# Altium PCB DGCtrl.PcbDoc (part 1 of 3)
Units mm, origin at the board's own origin, x right, y up, seen from the top; angles counter-clockwise.
Board outline 197.61 x 87.2 mm, 2 copper layers (Top Layer, Bottom Layer); 304 components, 306 nets, 985 pads, 136 vias.
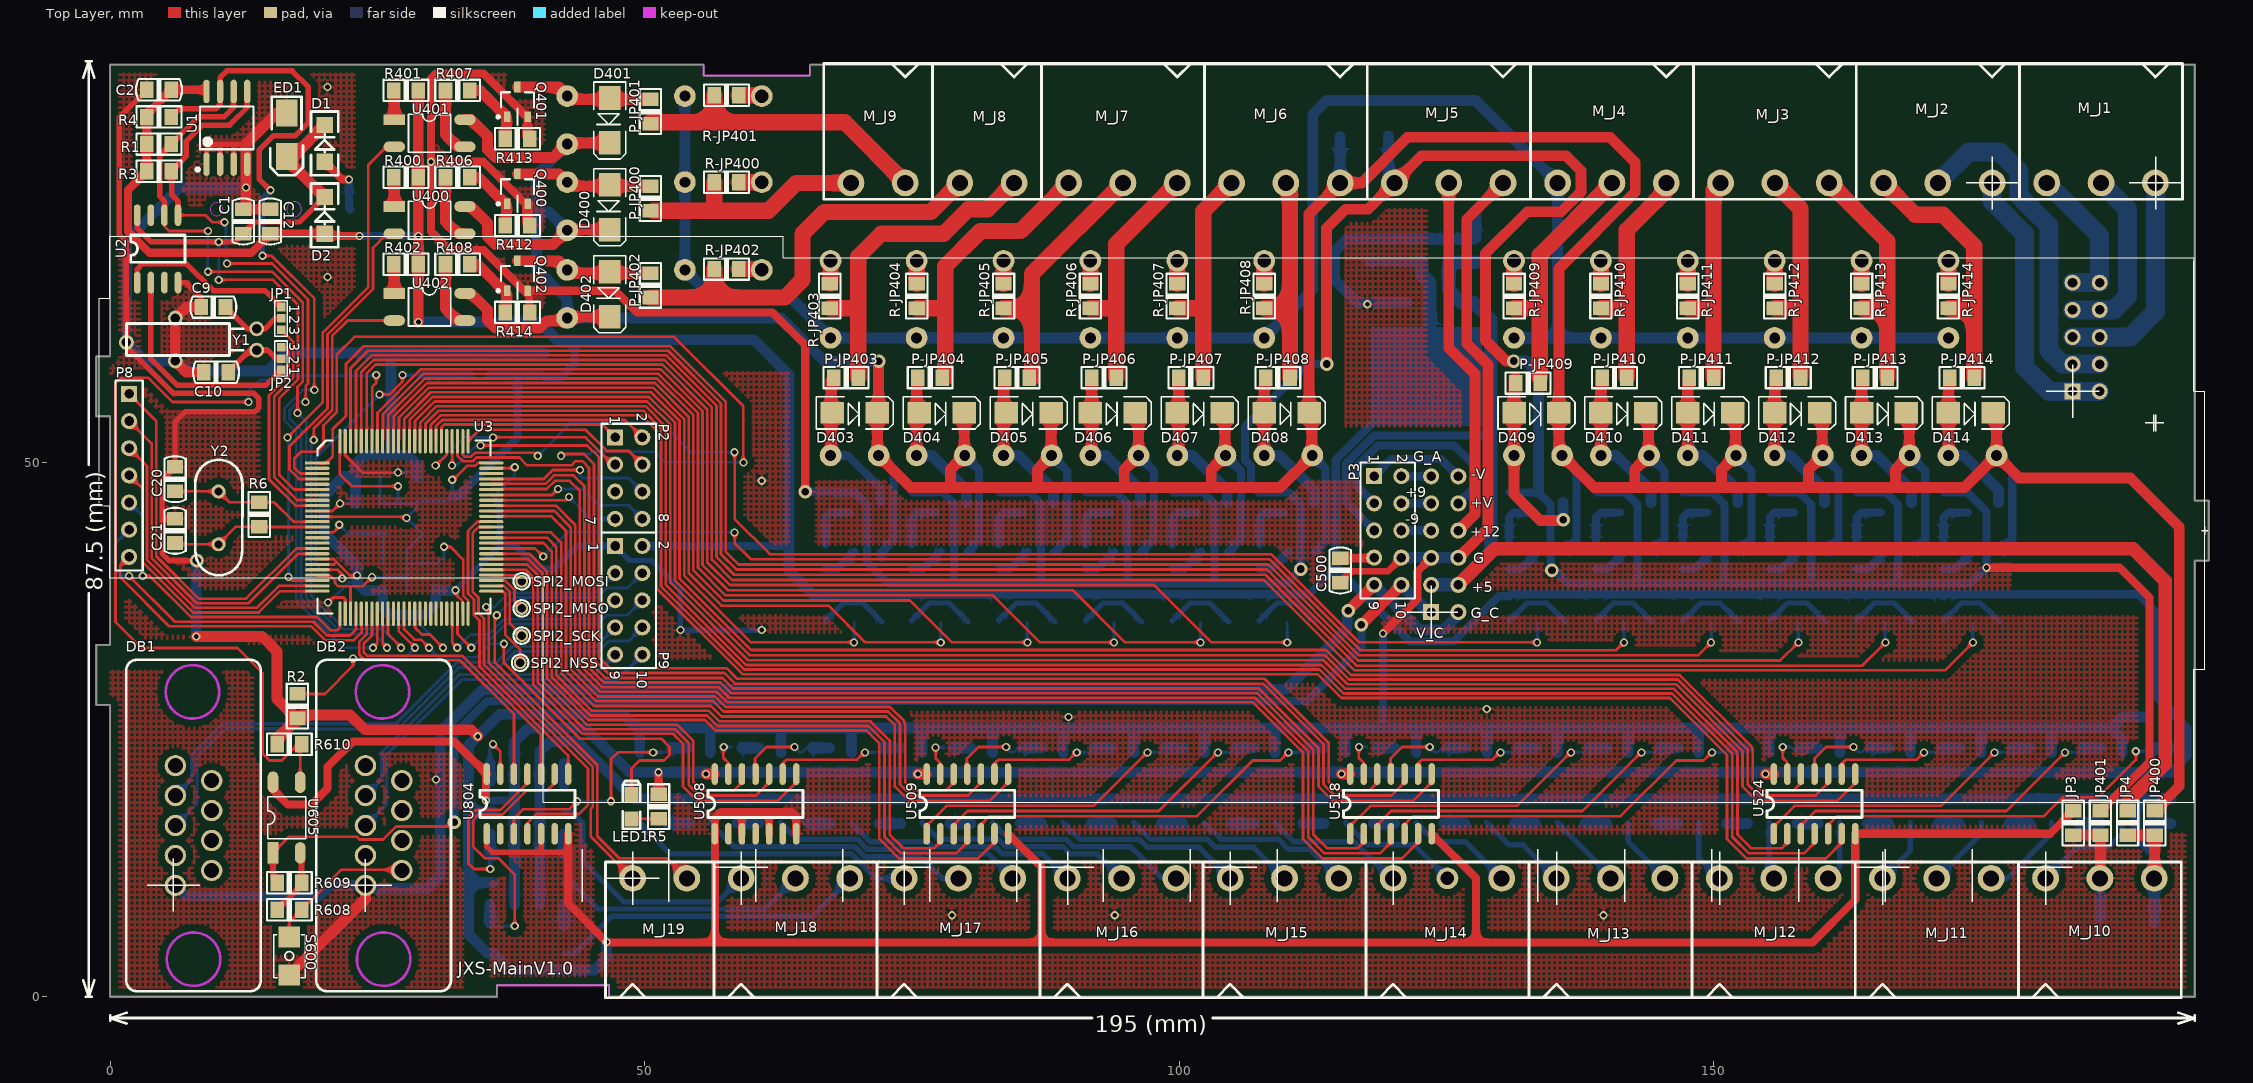
[diagram p0: Top Layer view]
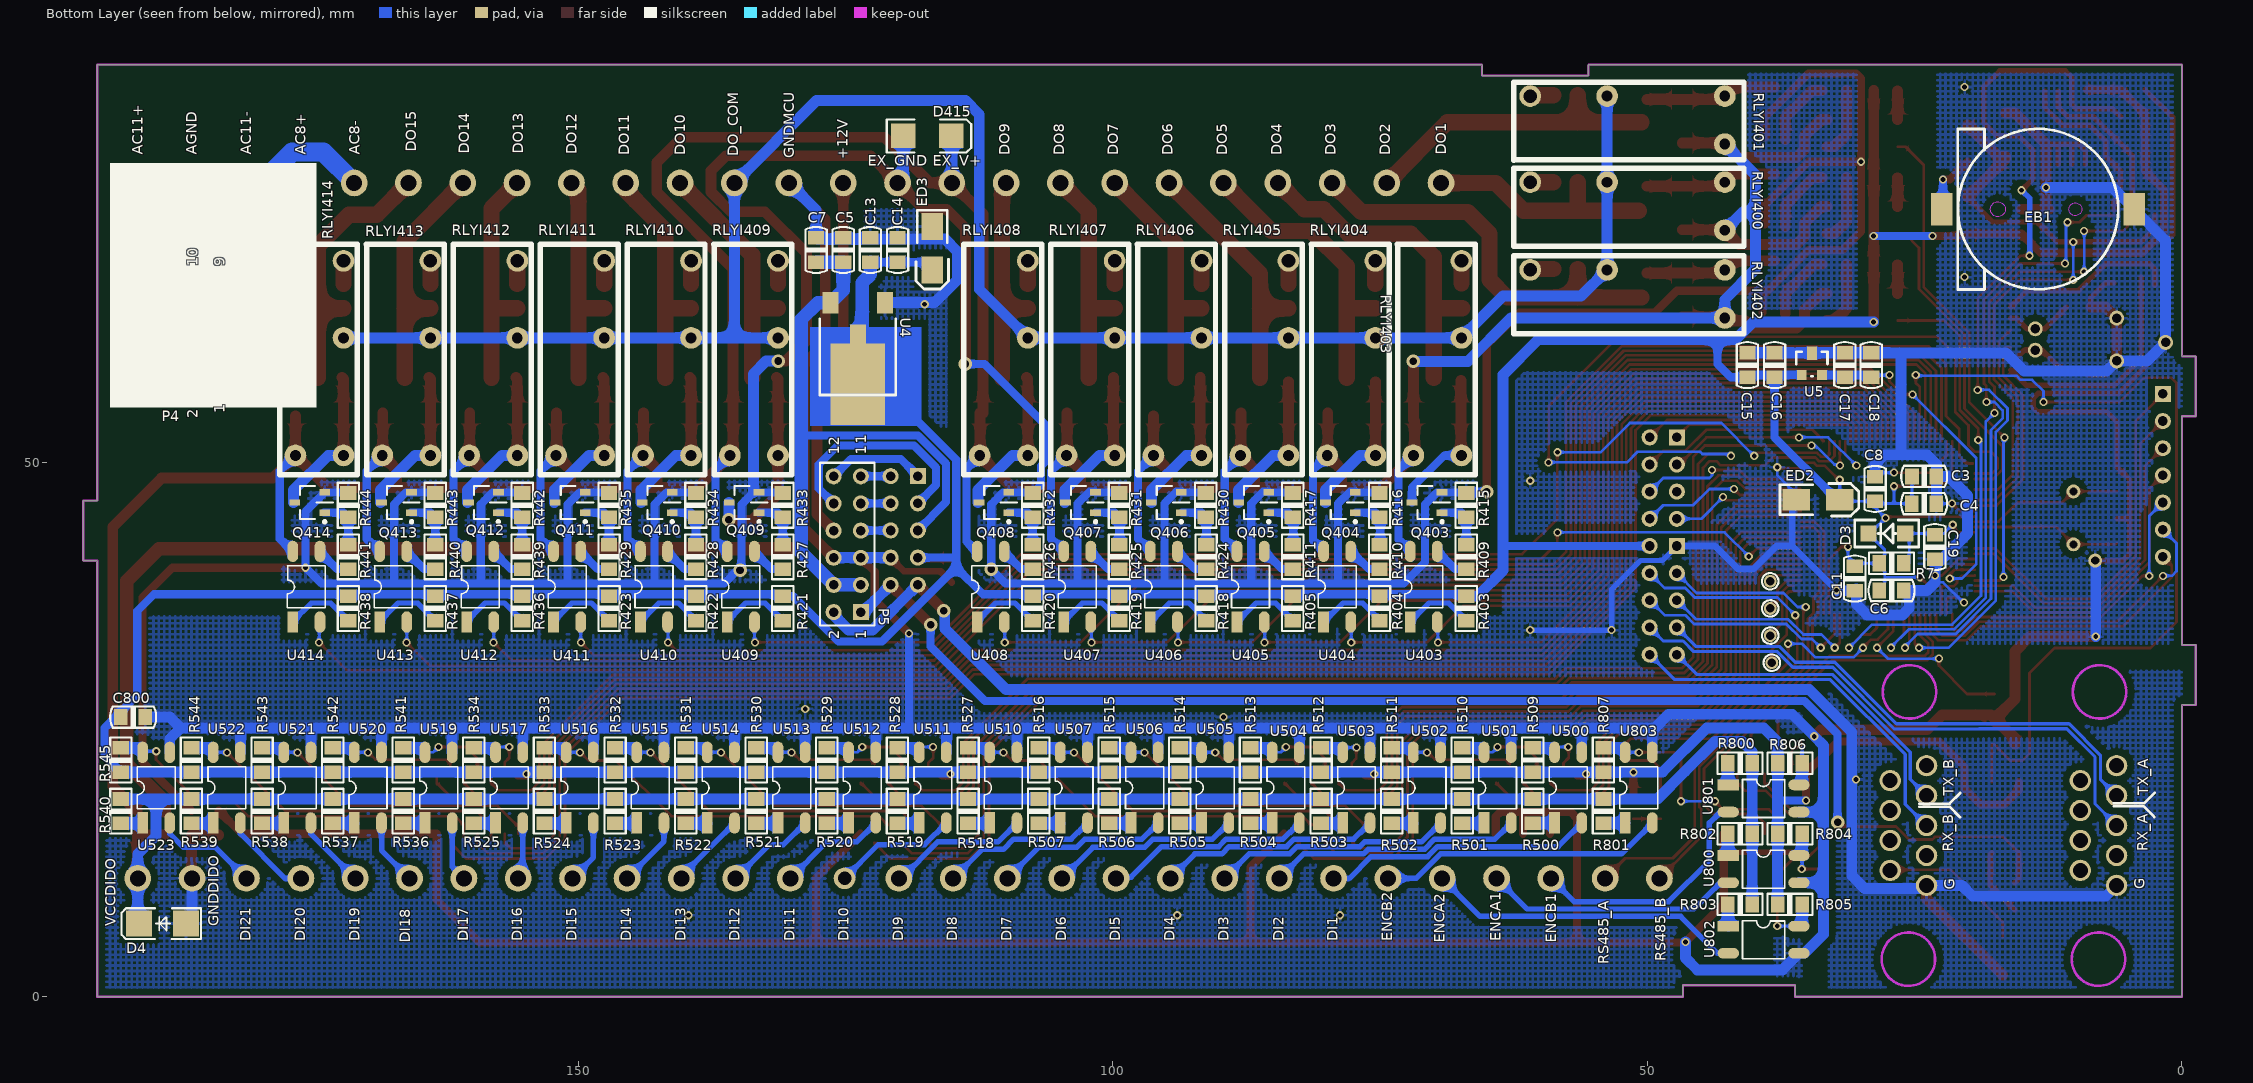
[diagram p1: Bottom Layer view, seen from below]

## Layer stack, top to bottom
Top Solder: solder mask 0.0102, Solder Resist, Dk 3.5
Top Layer: signal copper 0.0356
Dielectric 1: dielectric 0.32, FR-4, Dk 4.8
Bottom Layer: signal copper 0.0356
Bottom Solder: solder mask 0.0102, Solder Resist, Dk 3.5

## Board outline
-1.3,27.3 0,27.3 0,0 36.176,0 36.176,1.067 46.676,1.067 46.676,0 195.007,0 195.007,40.8 196.307,40.8 196.307,46.4 195.007,46.4 195.007,87.2 65.457,87.2 65.457,86.157 55.507,86.157 55.507,87.2 0,87.2 0,59.9 -1.3,59.9 -1.3,54.3 0,54.3 0,32.9 -1.3,32.9

## Design rules (kind name [scope] priority, off if disabled: settings)
Clearance Clearance_Ploygon [All vs InPolygon] p1: gap=0.635
Clearance [All] p2: gap=0.178
MinimumSolderMaskSliver MinimumSolderMaskSliver_TLP181 [(ISPAD AND InComponent('U501')) OR  (ISPAD AND InComponent('U502')) OR (ISPAD AND InComponent('U503')) OR (ISPAD AND InComponent('U504')) OR (ISPAD AND InComponent('U505')) OR (ISPAD AND InComponent('U506')) OR (ISPAD AND InComponent('U507')) OR (ISPAD AND InComponent('U510')) OR (ISPAD AND InComponent('U511')) OR (ISPAD AND InComponent('U512')) OR (ISPAD AND InComponent('U513')) OR (ISPAD AND InComponent('U514')) OR (ISPAD AND InComponent('U515')) OR (ISPAD AND InComponent('U516')) OR (ISPAD AND InComponent('U517')) OR (ISPAD AND InComponent('U519')) OR (ISPAD AND InComponent('U520')) OR (ISPAD AND InComponent('U521')) OR (ISPAD AND InComponent('U522')) OR (ISPAD AND InComponent('U523')) OR (ISPAD AND InComponent('U800')) OR (ISPAD AND InComponent('U801')) OR (ISPAD AND InComponent('U802')) OR (ISPAD AND InComponent('U803')) OR (ISPAD AND InComponent('U804')) OR (ISPAD AND InComponent('U500'))] p1: minsoldermaskwidth=0.178
MinimumSolderMaskSliver MinimumSolderMaskSliver_LQFP100 [HasFootprint('LQFP-100') vs HasFootprint('LQFP-100')] p2: minsoldermaskwidth=0
MinimumSolderMaskSliver MinimumSolderMaskSliver_JP-3 [HasFootprint('JP-3') vs HasFootprint('JP-3')] p3: minsoldermaskwidth=0
MinimumSolderMaskSliver [All] p4: minsoldermaskwidth=0.254
PolygonConnect [All] p1: connectstyle=Relief reliefconductorwidth=0.254 reliefentries=4 polygonreliefangle="90 Angle" airgapwidth=0.254
RoutingVias [All] p1: holewidth=0.457 width=0.762 viastyle="Through Hole" minholewidth=0.457 minwidth=0.762 maxholewidth=0.711 maxwidth=1.27
SilkToSilkClearance [All] p1: silktosilkclearance=0
SilkToSolderMaskClearance [IsPad] p1: minsilkscreentomaskgap=0 clearancetoexposedcopper=TRUE
SolderMaskExpansion [All] p1: expansion=0.102
Width [All] p1: maxlimit=2.54 minlimit=0.178 preferedwidth=0.254 minimp=50.000000 maximp=50.000000 favimp=50.000000
27 further rules are at their usual default settings.

## Classes and differential pairs
component class DGCtrl: C1 C2 C3 C4 C5 C6 C7 C8 C9 C10 C11 C12 C13 C14 C15 C16 C17 C18 C19 C20 C21 D1 D2 D3 D4 DB1 DB2 EB1 ED1 ED2 ED3 JP1 JP2 JP3 JP4 LED1 M_J1 M_J2 M_J3 M_J4 M_J5 M_J6 M_J7 M_J8 M_J9 M_J10 M_J11 M_J12 M_J13 M_J14 M_J15 M_J16 M_J17 M_J18 M_J19 P2 P3 P4 P5 P8 P9 R1 R2 R3 R4 R5 R6 R7 R608 R609 R610 S600 SPI2_MISO SPI2_MOSI SPI2_NSS SPI2_SCK U1 U2 U3 U4 U5 U605 Y1 Y2
component class Designator: C800 R800 R801 R802 R803 R804 R805 R806 R807 U800 U801 U802 U803 U804

## Components (designator, comment, footprint, x,y, rotation, side; value= is the part's Value field where it differs from the comment)
C1 "104" CAPC_E0805_2012X70N 12.446,72.517 r90 top locked
C2 "104" CAPC_E0805_2012X70N 4.572,84.836 r0 top locked
C3 "104" CAPC_E0805_2012X70N 24.105,48.666 r180 bottom locked
C4 "104" CAPC_E0805_2012X70N 24.111,46.126 r180 bottom locked
C5 "104" CAPC_E0805_2012X70N 125.222,69.85 r90 bottom locked
C6 "104" CAPC_E0805_2012X70N 27.153,37.998 r180 bottom locked
C7 "106" CAPC_E0805_2012X70N 127.762,69.85 r270 bottom locked
C8 "104" CAPC_E0805_2012X70N 28.702,47.498 r90 bottom locked
C9 "22P" CAPC_E0805_2012X70N 9.652,64.516 r180 top locked
C10 "22P" CAPC_E0805_2012X70N 9.906,58.42 r0 top locked
C11 "104" CAPC_E0805_2012X70N 30.607,39.116 r270 bottom locked
C12 "104" CAPC_E0805_2012X70N 14.986,72.517 r90 top locked
C13 "104" CAPC_E0805_2012X70N 122.682,69.85 r90 bottom locked
C14 "106" CAPC_E0805_2012X70N 120.142,69.85 r270 bottom locked
C15 "106" CAPC_E0805_2012X70N 40.64,59.08 r270 bottom locked
C16 "104" CAPC_E0805_2012X70N 38.1,59.08 r90 bottom locked
C17 "104" CAPC_E0805_2012X70N 31.521,59.08 r90 bottom locked
C18 "106" CAPC_E0805_2012X70N 29.058,59.08 r270 bottom locked
C19 "104" CAPC_E0805_2012X70N 23.095,42.062 r270 bottom locked
C20 "22P" CAPC_E0805_2012X70N 6.071,48.412 r270 top locked
C21 "22P" CAPC_E0805_2012X70N 6.071,43.586 r90 top locked
C500 "104" CAPC_E0805_2012X70N 115.062,39.878 r270 top locked
C800 "104" CAPC_E0805_2012X70N 191.643,26.162 r180 bottom locked
D1 "1N4148" N4148 20.066,78.105 r90 top locked
D2 "1N4148" N4148 20.066,71.374 r90 top locked
D3 "1N4148" N4148 25.889,43.332 r0 bottom locked
D4 "SMBJ24CA" SMB#1 186.69,6.858 r0 bottom locked
D400 "1N4007" SMA 46.736,75.939 r270 top locked
D401 "1N4007" SMA 46.736,84.067 r270 top locked
D402 "1N4007" SMA 46.736,67.811 r270 top locked
D403 "1N4007" SMA 67.571,54.61 r0 top locked
D404 "1N4007" SMA 75.699,54.61 r0 top locked
D405 "1N4007" SMA 83.827,54.61 r0 top locked
D406 "1N4007" SMA 91.701,54.61 r0 top locked
D407 "1N4007" SMA 99.829,54.61 r0 top locked
D408 "1N4007" SMA 107.957,54.61 r0 top locked
D409 "1N4007" SMA 131.325,54.61 r0 top locked
D410 "1N4007" SMA 139.453,54.61 r0 top locked
D411 "1N4007" SMA 147.581,54.61 r0 top locked
D412 "1N4007" SMA 155.709,54.61 r0 top locked
D413 "1N4007" SMA 163.837,54.61 r0 top locked
D414 "1N4007" SMA 171.965,54.61 r0 top locked
D415 "SMBJ24CA" SMB#2 117.348,80.518 r180 bottom locked
DB1 "DB9_1" DB9-DIP 6.103,10.414 r90 top locked
DB2 "DB9_1" DB9-DIP 23.883,10.414 r90 top locked
EB1 "CR1220" CR1220 13.462,73.66 r90 bottom locked
ED1 "10uF/16V" 3528 16.51,78.609 r270 top locked
ED2 "10uF/16V" 3528 32.004,46.482 r180 bottom locked
ED3 "10uF/16V" 3528 116.891,67.976 r270 bottom locked
JP1 "Header 3" JP-3 16.002,64.516 r270 top locked
JP2 "Header 3" JP-3 16.002,58.623 r90 top locked
JP3 "0805" RESC_E0805_2012X50N 183.642,16.256 r270 top locked
JP4 "0805" RESC_E0805_2012X50N 188.722,16.256 r270 top locked
JP400 "0" RESC_E0805_2012X50N 191.262,16.256 r270 top locked
JP401 "0" RESC_E0805_2012X50N 186.182,16.256 r270 top locked
LED1 "LED" LED0805 48.768,17.78 r90 top locked
M_J1 "Header 3" DG5.08-3#1 191.32,76.124 r180 top locked
M_J2 "Header 3" DG5.08-3#1 176.048,76.122 r180 top locked
M_J3 "Header 3" DG5.08-3#1 160.808,76.122 r180 top locked
M_J4 "Header 3" DG5.08-3#1 145.568,76.122 r180 top locked
M_J5 "Header 3" DG5.08-3#1 130.302,76.122 r180 top locked
M_J6 "Header 3" DG5.08-3#1 115.062,76.122 r180 top locked
M_J7 "Header 3" DG5.08-3#1 99.822,76.122 r180 top locked
M_J8 "Header 2" DG5.08-2 84.563,76.124 r180 top locked
M_J9 "Header 2" DG5.08-2 74.378,76.124 r180 top locked
M_J10 "Header 3" DG5.08-3#1 181.052,11.074 r0 top locked
M_J11 "Header 3" DG5.08-3#1 165.786,11.074 r0 top locked
M_J12 "Header 3" DG5.08-3#1 150.546,11.074 r0 top locked
M_J13 "Header 3" DG5.08-3#1 135.281,11.074 r0 top locked
M_J14 "Header 3" DG5.08-3#2 120.015,11.074 r0 top locked
M_J15 "Header 3" DG5.08-3#1 104.775,11.074 r0 top locked
M_J16 "Header 3" DG5.08-3#1 89.535,11.074 r0 top locked
M_J17 "Header 3" DG5.08-3#1 74.27,11.074 r0 top locked
M_J18 "Header 3" DG5.08-3#1 59.03,11.074 r0 top locked
M_J19 "Header 2" DG5.08-2 48.87,11.074 r0 top locked
P2 "Header 4X2" HDR2X4 47.244,52.324 r270 top locked
P3 "Header 5X2" HDR2X5 118.244,48.692 r270 top locked
P4 "Header 5X2" HDR2X5 183.573,56.629 r90 bottom locked
P5 "Header 6X2" HDR2X6 123.578,35.979 r90 bottom locked
P8 "Header 7" HDR1X7 1.778,56.388 r270 top locked
P9 "Header 5X2" HDR2X5 47.244,42.164 r270 top locked
P-JP400 "0805" RESC_E0805_2012X50N 50.546,74.676 r90 top locked
P-JP401 "0805" RESC_E0805_2012X50N 50.546,82.797 r90 top locked
P-JP402 "0805" RESC_E0805_2012X50N 50.546,66.548 r90 top locked
P-JP403 "0805" RESC_E0805_2012X50N 68.841,57.912 r180 top locked
P-JP404 "0805" RESC_E0805_2012X50N 76.708,57.912 r180 top locked
P-JP405 "0805" RESC_E0805_2012X50N 84.836,57.912 r180 top locked
P-JP406 "0805" RESC_E0805_2012X50N 92.971,57.912 r180 top locked
P-JP407 "0805" RESC_E0805_2012X50N 101.099,57.912 r180 top locked
P-JP408 "0805" RESC_E0805_2012X50N 109.227,57.912 r180 top locked
P-JP409 "0805" RESC_E0805_2012X50N 132.639,57.404 r180 top locked
P-JP410 "0805" RESC_E0805_2012X50N 140.723,57.912 r180 top locked
P-JP411 "0805" RESC_E0805_2012X50N 148.851,57.912 r180 top locked
P-JP412 "0805" RESC_E0805_2012X50N 156.979,57.912 r180 top locked
P-JP413 "0805" RESC_E0805_2012X50N 165.107,57.912 r180 top locked
P-JP414 "0805" RESC_E0805_2012X50N 173.235,57.912 r180 top locked
Q400 "8050(Y1)" SOT23_95P280X110-3N 38.1,75.572 r90 top locked
Q401 "8050(Y1)" SOT23_95P280X110-3N 38.1,83.7 r90 top locked
Q402 "8050(Y1)" SOT23_95P280X110-3N 38.1,67.444 r90 top locked
Q403 "8050(Y1)" SOT23_95P280X110-3N 70.612,46.228 r0 bottom locked
Q404 "8050(Y1)" SOT23_95P280X110-3N 78.715,46.228 r0 bottom locked
Q405 "8050(Y1)" SOT23_95P280X110-3N 86.817,46.228 r0 bottom locked
Q406 "8050(Y1)" SOT23_95P280X110-3N 94.996,46.228 r0 bottom locked
Q407 "8050(Y1)" SOT23_95P280X110-3N 103.022,46.228 r0 bottom locked
Q408 "8050(Y1)" SOT23_95P280X110-3N 111.125,46.228 r0 bottom locked
Q409 "8050(Y1)" SOT23_95P280X110-3N 134.493,46.228 r0 bottom locked
Q410 "8050(Y1)" SOT23_95P280X110-3N 142.621,46.228 r0 bottom locked
Q411 "8050(Y1)" SOT23_95P280X110-3N 150.749,46.228 r0 bottom locked
Q412 "8050(Y1)" SOT23_95P280X110-3N 158.877,46.228 r0 bottom locked
Q413 "8050(Y1)" SOT23_95P280X110-3N 167.005,46.228 r0 bottom locked
Q414 "8050(Y1)" SOT23_95P280X110-3N 175.133,46.228 r0 bottom locked
R1 "4.7K" RESC_E0805_2012X50N 4.572,79.756 r180 top locked
R2 "10K" RESC_E0805_2012X50N 17.526,27.178 r90 top locked
R3 "4.7K" RESC_E0805_2012X50N 4.572,77.209 r180 top locked
R4 "4.7K" RESC_E0805_2012X50N 4.572,82.296 r180 top locked
R5 "2K" RESC_E0805_2012X50N 51.308,17.78 r90 top locked
R6 "1M" RESC_E0805_2012X50N 13.951,45.11 r90 top locked
R7 "10K" RESC_E0805_2012X50N 27.159,40.538 r0 bottom locked
R400 "1K" RESC_E0805_2012X50N 27.686,76.647 r180 top locked
R401 "1K" RESC_E0805_2012X50N 27.686,84.775 r180 top locked
R402 "1K" RESC_E0805_2012X50N 27.686,68.519 r180 top locked
R403 "1K" RESC_E0805_2012X50N 66.935,36.322 r270 bottom locked
R404 "1K" RESC_E0805_2012X50N 75.048,36.322 r270 bottom locked
R405 "1K" RESC_E0805_2012X50N 83.162,36.322 r270 bottom locked
R406 "1K" RESC_E0805_2012X50N 32.512,76.647 r180 top locked
R407 "1K" RESC_E0805_2012X50N 32.512,84.775 r180 top locked
R408 "1K" RESC_E0805_2012X50N 32.512,68.519 r180 top locked
R409 "1K" RESC_E0805_2012X50N 66.935,41.148 r270 bottom locked
R410 "1K" RESC_E0805_2012X50N 75.048,41.148 r270 bottom locked
R411 "1K" RESC_E0805_2012X50N 83.162,41.148 r270 bottom locked
R412 "1K" RESC_E0805_2012X50N 38.1,72.136 r180 top locked
R413 "1K" RESC_E0805_2012X50N 38.1,80.264 r180 top locked
R414 "1K" RESC_E0805_2012X50N 38.1,64.008 r180 top locked
R415 "1K" RESC_E0805_2012X50N 66.935,45.974 r270 bottom locked
R416 "1K" RESC_E0805_2012X50N 75.048,45.974 r270 bottom locked
R417 "1K" RESC_E0805_2012X50N 83.162,45.974 r270 bottom locked
R418 "1K" RESC_E0805_2012X50N 91.276,36.322 r270 bottom locked
R419 "1K" RESC_E0805_2012X50N 99.389,36.322 r270 bottom locked
R420 "1K" RESC_E0805_2012X50N 107.503,36.322 r270 bottom locked
R421 "1K" RESC_E0805_2012X50N 130.871,36.322 r270 bottom locked
R422 "1K" RESC_E0805_2012X50N 138.999,36.322 r270 bottom locked
R423 "1K" RESC_E0805_2012X50N 147.127,36.322 r270 bottom locked
R424 "1K" RESC_E0805_2012X50N 91.276,41.148 r270 bottom locked
R425 "1K" RESC_E0805_2012X50N 99.389,41.148 r270 bottom locked
R426 "1K" RESC_E0805_2012X50N 107.503,41.148 r270 bottom locked
R427 "1K" RESC_E0805_2012X50N 130.871,41.148 r270 bottom locked
R428 "1K" RESC_E0805_2012X50N 138.999,41.148 r270 bottom locked
R429 "1K" RESC_E0805_2012X50N 147.127,41.148 r270 bottom locked
R430 "1K" RESC_E0805_2012X50N 91.313,45.974 r270 bottom locked
R431 "1K" RESC_E0805_2012X50N 99.389,45.974 r270 bottom locked
R432 "1K" RESC_E0805_2012X50N 107.503,45.974 r270 bottom locked
R433 "1K" RESC_E0805_2012X50N 130.871,45.974 r270 bottom locked
R434 "1K" RESC_E0805_2012X50N 138.999,45.974 r270 bottom locked
R435 "1K" RESC_E0805_2012X50N 147.127,45.974 r270 bottom locked
R436 "1K" RESC_E0805_2012X50N 155.255,36.322 r270 bottom locked
R437 "1K" RESC_E0805_2012X50N 163.383,36.322 r270 bottom locked
R438 "1K" RESC_E0805_2012X50N 171.511,36.322 r270 bottom locked
R439 "1K" RESC_E0805_2012X50N 155.255,41.148 r270 bottom locked
R440 "1K" RESC_E0805_2012X50N 163.383,41.148 r270 bottom locked
R441 "1K" RESC_E0805_2012X50N 171.511,41.148 r270 bottom locked
R442 "1K" RESC_E0805_2012X50N 155.255,45.974 r270 bottom locked
R443 "1K" RESC_E0805_2012X50N 163.383,45.974 r270 bottom locked
R444 "1K" RESC_E0805_2012X50N 171.511,45.974 r270 bottom locked
R500 "4.7K" RESC_E0805_2012X50N 60.713,17.354 r90 bottom locked
R501 "4.7K" RESC_E0805_2012X50N 67.317,17.354 r90 bottom locked
R502 "4.7K" RESC_E0805_2012X50N 73.921,17.354 r90 bottom locked
R503 "4.7K" RESC_E0805_2012X50N 80.525,17.354 r90 bottom locked
R504 "4.7K" RESC_E0805_2012X50N 87.129,17.354 r90 bottom locked
R505 "4.7K" RESC_E0805_2012X50N 93.733,17.354 r90 bottom locked
R506 "4.7K" RESC_E0805_2012X50N 100.337,17.354 r90 bottom locked
R507 "4.7K" RESC_E0805_2012X50N 106.941,17.354 r90 bottom locked
R509 "1K" RESC_E0805_2012X50N 60.713,22.139 r270 bottom locked
R510 "1K" RESC_E0805_2012X50N 67.317,22.139 r270 bottom locked
R511 "1K" RESC_E0805_2012X50N 73.921,22.139 r270 bottom locked
R512 "1K" RESC_E0805_2012X50N 80.525,22.139 r270 bottom locked
R513 "1K" RESC_E0805_2012X50N 87.129,22.139 r270 bottom locked
R514 "1K" RESC_E0805_2012X50N 93.733,22.139 r270 bottom locked
R515 "1K" RESC_E0805_2012X50N 100.337,22.139 r270 bottom locked
R516 "1K" RESC_E0805_2012X50N 106.941,22.139 r270 bottom locked
R518 "4.7K" RESC_E0805_2012X50N 113.545,17.354 r90 bottom locked
R519 "4.7K" RESC_E0805_2012X50N 120.149,17.354 r90 bottom locked
R520 "4.7K" RESC_E0805_2012X50N 126.753,17.354 r90 bottom locked
R521 "4.7K" RESC_E0805_2012X50N 133.357,17.354 r90 bottom locked
R522 "4.7K" RESC_E0805_2012X50N 139.961,17.354 r90 bottom locked
R523 "4.7K" RESC_E0805_2012X50N 146.565,17.354 r90 bottom locked
R524 "4.7K" RESC_E0805_2012X50N 153.169,17.354 r90 bottom locked
R525 "4.7K" RESC_E0805_2012X50N 159.773,17.354 r90 bottom locked
R527 "1K" RESC_E0805_2012X50N 113.545,22.139 r270 bottom locked
R528 "1K" RESC_E0805_2012X50N 120.149,22.139 r270 bottom locked
R529 "1K" RESC_E0805_2012X50N 126.753,22.139 r270 bottom locked
R530 "1K" RESC_E0805_2012X50N 133.357,22.139 r270 bottom locked
R531 "1K" RESC_E0805_2012X50N 139.961,22.139 r270 bottom locked
R532 "1K" RESC_E0805_2012X50N 146.565,22.139 r270 bottom locked
R533 "1K" RESC_E0805_2012X50N 153.169,22.139 r270 bottom locked
R534 "1K" RESC_E0805_2012X50N 159.773,22.139 r270 bottom locked
R536 "4.7K" RESC_E0805_2012X50N 166.377,17.354 r90 bottom locked
R537 "4.7K" RESC_E0805_2012X50N 172.981,17.354 r90 bottom locked
R538 "4.7K" RESC_E0805_2012X50N 179.585,17.354 r90 bottom locked
R539 "4.7K" RESC_E0805_2012X50N 186.189,17.354 r90 bottom locked
R540 "4.7K" RESC_E0805_2012X50N 192.793,17.354 r90 bottom locked
R541 "1K" RESC_E0805_2012X50N 166.377,22.139 r270 bottom locked
R542 "1K" RESC_E0805_2012X50N 172.981,22.139 r270 bottom locked
R543 "1K" RESC_E0805_2012X50N 179.585,22.139 r270 bottom locked
R544 "1K" RESC_E0805_2012X50N 186.189,22.139 r270 bottom locked
R545 "1K" RESC_E0805_2012X50N 192.793,22.139 r270 bottom locked
R608 "2K" RESC_E0805_2012X50N 16.764,8.128 r0 top locked
R609 "100K" RESC_E0805_2012X50N 16.764,10.668 r0 top locked
R610 "10K" RESC_E0805_2012X50N 16.764,23.622 r180 top locked
R800 "470" RESC_E0805_2012X50N 41.326,21.844 r0 bottom locked
R801 "470" RESC_E0805_2012X50N 54.109,17.354 r90 bottom locked
R802 "470" RESC_E0805_2012X50N 41.326,15.24 r180 bottom locked
R803 "470" RESC_E0805_2012X50N 41.326,8.634 r0 bottom locked
R804 "1K" RESC_E0805_2012X50N 36.669,15.24 r180 bottom locked
R805 "1K" RESC_E0805_2012X50N 36.669,8.634 r180 bottom locked
R806 "1K" RESC_E0805_2012X50N 36.669,21.844 r180 bottom locked
R807 "1K" RESC_E0805_2012X50N 54.109,22.139 r90 bottom locked
R-JP400 "0805" RESC_E0805_2012X50N 57.658,76.193 r0 top locked
R-JP401 "0805" RESC_E0805_2012X50N 57.658,84.321 r0 top locked
R-JP402 "0805" RESC_E0805_2012X50N 57.658,68.065 r0 top locked
R-JP403 "0805" RESC_E0805_2012X50N 67.317,65.532 r90 top locked
R-JP404 "0805" RESC_E0805_2012X50N 75.445,65.532 r90 top locked
R-JP405 "0805" RESC_E0805_2012X50N 83.573,65.532 r90 top locked
R-JP406 "0805" RESC_E0805_2012X50N 91.701,65.532 r90 top locked
R-JP407 "0805" RESC_E0805_2012X50N 99.829,65.532 r90 top locked
R-JP408 "0805" RESC_E0805_2012X50N 107.957,65.532 r90 top locked
R-JP409 "0805" RESC_E0805_2012X50N 131.325,65.532 r90 top locked
R-JP410 "0805" RESC_E0805_2012X50N 139.453,65.532 r90 top locked
R-JP411 "0805" RESC_E0805_2012X50N 147.581,65.532 r90 top locked
R-JP412 "0805" RESC_E0805_2012X50N 155.709,65.532 r90 top locked
R-JP413 "0805" RESC_E0805_2012X50N 163.837,65.532 r90 top locked
R-JP414 "0805" RESC_E0805_2012X50N 171.965,65.532 r90 top locked
RLYI400 "Relay-SPST" JDQ24V#1 60.96,76.193 r90 bottom locked
RLYI401 "Relay-SPST" JDQ24V#2 60.96,79.749 r90 bottom locked
RLYI402 "Relay-SPST" JDQ24V#2 60.96,63.493 r90 bottom locked
RLYI403 "Relay-SPST" JDQ24V#2 71.889,68.834 r180 bottom locked
RLYI404 "Relay-SPST" JDQ24V#1 75.445,68.834 r180 bottom locked
RLYI405 "Relay-SPST" JDQ24V#1 83.573,68.834 r180 bottom locked
RLYI406 "Relay-SPST" JDQ24V#1 91.701,68.834 r180 bottom locked
RLYI407 "Relay-SPST" JDQ24V#1 99.829,68.834 r180 bottom locked
RLYI408 "Relay-SPST" JDQ24V#1 107.957,68.834 r180 bottom locked
RLYI409 "Relay-SPST" JDQ24V#1 131.325,68.834 r180 bottom locked
RLYI410 "Relay-SPST" JDQ24V#1 139.453,68.834 r180 bottom locked
RLYI411 "Relay-SPST" JDQ24V#1 147.581,68.834 r180 bottom locked
RLYI412 "Relay-SPST" JDQ24V#1 155.709,68.834 r180 bottom locked
RLYI413 "Relay-SPST" JDQ24V#1 163.837,68.834 r180 bottom locked
RLYI414 "Relay-SPST" JDQ24V#1 171.965,68.834 r180 bottom locked
S600 "SW-PB" my-key2 16.764,3.81 r90 top locked
SPI2_MISO "TestPoint" Hole 38.506,36.322 r180 top locked
SPI2_MOSI "TestPoint" Hole 38.506,38.862 r90 top locked
SPI2_NSS "TestPoint" Hole 38.354,31.242 r180 top locked
SPI2_SCK "TestPoint" Hole 38.506,33.782 r180 top locked
U1 "FM24C256A" SOP8_208Mil 10.922,81.28 r0 top locked
U2 "PCF8563T" SO-8 2.54,66.802 r90 top locked
U3 "STM32F103VET6" LQFP-100 19.793,49.936 r0 top locked
U4 "LM1117" SOT-252 123.857,57.302 r90 bottom locked
U5 "REF3025" SOT-23 35.56,58.166 r180 bottom locked
U400 "TLP181/IS181B" TLP181 26.588,73.917 r0 top locked
U401 "TLP181/IS181B" TLP181 26.588,82.045 r0 top locked
U402 "TLP181/IS181B" TLP181 26.588,65.789 r0 top locked
U403 "TLP181/IS181B" TLP181 72.185,35.052 r90 bottom locked
U404 "TLP181/IS181B" TLP181 80.288,35.052 r90 bottom locked
U405 "TLP181/IS181B" TLP181 88.391,35.052 r90 bottom locked
U406 "TLP181/IS181B" TLP181 96.493,35.052 r90 bottom locked
U407 "TLP181/IS181B" TLP181 104.596,35.052 r90 bottom locked
U408 "TLP181/IS181B" TLP181 112.698,35.052 r90 bottom locked
U409 "TLP181/IS181B" TLP181 136.066,35.052 r90 bottom locked
U410 "TLP181/IS181B" TLP181 144.194,35.052 r90 bottom locked
U411 "TLP181/IS181B" TLP181 152.322,35.052 r90 bottom locked
U412 "TLP181/IS181B" TLP181 160.45,35.052 r90 bottom locked
U413 "TLP181/IS181B" TLP181 168.578,35.052 r90 bottom locked
U414 "TLP181/IS181B" TLP181 176.706,35.052 r90 bottom locked
U500 "TLP181/IS181B" TLP181 58.681,16.256 r90 bottom locked
U501 "TLP181/IS181B" TLP181 65.285,16.256 r90 bottom locked
U502 "TLP181/IS181B" TLP181 71.889,16.256 r90 bottom locked
U503 "TLP181/IS181B" TLP181 78.493,16.256 r90 bottom locked
U504 "TLP181/IS181B" TLP181 85.097,16.256 r90 bottom locked
U505 "TLP181/IS181B" TLP181 91.701,16.256 r90 bottom locked
U506 "TLP181/IS181B" TLP181 98.305,16.256 r90 bottom locked
U507 "TLP181/IS181B" TLP181 104.909,16.256 r90 bottom locked
U508 "74HC14" SO-14 56.566,15.24 r90 top locked
U509 "74HC14" SO-14 76.378,15.24 r90 top locked
U510 "TLP181/IS181B" TLP181 111.513,16.256 r90 bottom locked
U511 "TLP181/IS181B" TLP181 118.117,16.256 r90 bottom locked
U512 "TLP181/IS181B" TLP181 124.721,16.256 r90 bottom locked
U513 "TLP181/IS181B" TLP181 131.325,16.256 r90 bottom locked
U514 "TLP181/IS181B" TLP181 137.929,16.256 r90 bottom locked
U515 "TLP181/IS181B" TLP181 144.533,16.256 r90 bottom locked
U516 "TLP181/IS181B" TLP181 151.137,16.256 r90 bottom locked
U517 "TLP181/IS181B" TLP181 157.741,16.256 r90 bottom locked
U518 "74HC14" SO-14 116.002,15.24 r90 top locked
U519 "TLP181/IS181B" TLP181 164.345,16.256 r90 bottom locked
U520 "TLP181/IS181B" TLP181 170.949,16.256 r90 bottom locked
U521 "TLP181/IS181B" TLP181 177.553,16.256 r90 bottom locked
U522 "TLP181/IS181B" TLP181 184.157,16.256 r90 bottom locked
U523 "TLP181/IS181B" TLP181 190.761,16.256 r90 bottom locked
U524 "74HC14" SO-14 155.626,15.24 r90 top locked
U605 "TLP181" TLP181 15.24,13.462 r90 top locked
U800 "TLP181" TLP181 42.425,13.208 r180 bottom locked
U801 "TLP181" TLP181 42.425,19.812 r180 bottom locked
U802 "TLP181" TLP181 42.425,6.604 r180 bottom locked
U803 "TLP181" TLP181 52.077,16.256 r90 bottom locked
U804 "74HC14" SO-14 35.231,15.24 r90 top locked
Y1 "32.768kHz" XTAL2A 13.716,61.468 r180 top locked
Y2 "8M" JZ 10.141,42.316 r90 top locked

## Footprints (in the part's own frame and the unit in brackets; to place one, negate y for a bottom-side part, rotate by r counter-clockwise, add the part's x,y. Pads: shape width x height; smd on the part's side, far side on the other; paste and mask are expansions set on the pad)
3528 [mil]
  rect 100x80 smd: 1(0,0) 2(-160,0)
  silkscreen extent -220,-60 70,60
CAPC_E0805_2012X70N [mil] "non-polarized,Chip;2.00mm L X 1.20mm W X 0.70mm H"
  rect 50x60 smd: 1(-45,0) 2(45,0)
  silkscreen extent -85,-39 85,39
CR1220 [mm] "SMD电池座封装"
  rect 3x2 smd: 1(0,9) 2(0,-9)
  Keep-Out Layer circle w0.076: c0,-3.5 r0.6
  Keep-Out Layer circle w0.076: c0,3.75 r0.7
  silkscreen extent -7.5,-7.51 7.52,7.5
DB9-DIP [mm]
  round 2 hole 1.4: 1(11.2,0) 2(8.4,0) 3(5.6,0) 4(2.8,0) 5(0,0) 6(9.8,-3.4) 7(7,-3.4) 8(4.2,-3.4) 9(1.4,-3.4)
  Keep-Out Layer circle w0.254: c-6.9,-1.7 r2.5
  Keep-Out Layer circle w0.254: c18.1,-1.6 r2.5
  silkscreen extent -9.9,-8 21.1,4.6
DG5.08-2 [mm]
  round 2.5 hole 1.5: 1(0,0) 2(5.08,0)
  silkscreen extent -2.54,-11.18 7.62,1.52
DG5.08-3#1 [mm]
  round 2.5 hole 1.5: 1(0,0) 2(5.08,0) 3(10.16,0)
  silkscreen extent -2.54,-11.18 12.7,1.52
DG5.08-3#2 [mm]
  round 2.5 hole 1.5: 1(0,0) 3(10.16,0)
  round 2.032 hole 1.27: 2(5.08,0)
  silkscreen extent -2.54,-11.18 12.7,1.52
HDR1X7 [mm] "Connector; Header; 7 Position"
  rect 1.5x1.5 hole 0.9: 1(0,0)
  round 1.5 hole 0.9: 2(2.54,0) 3(5.08,0) 4(7.62,0) 5(10.16,0) 6(12.7,0) 7(15.24,0)
  silkscreen extent -1.27,-1.27 16.51,1.27
HDR2X4 [mm] "Connector; Header; 4x2 Position"
  rect 1.5x1.5 hole 0.9: 1(0,0)
  round 1.5 hole 0.9: 2(0,2.54) 3(2.54,0) 4(2.54,2.54) 5(5.08,0) 6(5.08,2.54) 7(7.62,0) 8(7.62,2.54)
  silkscreen extent -1.27,-1.27 8.89,3.81
HDR2X5 [mm] "Connector; Header; 5x2 Position"
  rect 1.5x1.5 hole 0.9: 1(0,0)
  round 1.5 hole 0.9: 2(0,2.54) 3(2.54,0) 4(2.54,2.54) 5(5.08,0) 6(5.08,2.54) 7(7.62,0) 8(7.62,2.54) 9(10.16,0) 10(10.16,2.54)
  silkscreen extent -1.27,-1.27 11.43,3.81
HDR2X6 [mm] "Connector; Header; 6x2 Position"
  rect 1.5x1.5 hole 0.9: 1(0,0)
  round 1.5 hole 0.9: 2(0,2.54) 3(2.54,0) 4(2.54,2.54) 5(5.08,0) 6(5.08,2.54) 7(7.62,0) 8(7.62,2.54) 9(10.16,0) 10(10.16,2.54) 11(12.7,0) 12(12.7,2.54)
  silkscreen extent -1.27,-1.27 13.97,3.81
Hole [mm] "0.8mm"
  round 1.2 hole 0.8: 1(0,0)
  silkscreen extent -0.77,-0.77 0.77,0.77
JDQ24V#1 [mil]
  round 80 hole 50: 1(0,0)
  round 80 hole 40: 2(0,-283.46) 3(-177.17,-716.53) 4(0,-716.53)
  silkscreen extent -236,-787 51,61
JDQ24V#2 [mil]
  round 80 hole 50: 1(177.16,0)
  round 80 hole 40: 2(177.16,-283.46) 3(0,-716.53) 4(177.16,-716.53)
  silkscreen extent -59,-787 228,61
JP-3 [mm]
  rect 0.8x0.8 smd: 1(0,0) 2(1.067,0) 3(2.134,0)
  silkscreen extent -0.58,-0.58 2.72,0.58
JZ [mm]
  round 1.3 hole 0.762: 1(0,0) 2(4.953,0) 3(-1.524,2.032)
  silkscreen extent -2.89,-2.23 7.91,2.19
LED0805 [mm]
  rect 1.4x1.27 smd: 1(-1.143,0) 2(1.143,0)
  silkscreen extent -2.06,-0.81 2.4,0.81
LQFP-100 [mil]
  rect 90x11.5 smd: 1(-16,0)
  oval 90x11.5 smd: 2(-16,-19.69) 3(-16,-39.37) 4(-16,-59.06) 5(-16,-78.74) 6(-16,-98.43) 7(-16,-118.11) 8(-16,-137.8) 9(-16,-157.48) 10(-16,-177.16) 11(-16,-196.85) 12(-16,-216.53) 13(-16,-236.22) 14(-16,-255.91) 15(-16,-275.59) 16(-16,-295.28) 17(-16,-314.96) 18(-16,-334.64) 19(-16,-354.33) 20(-16,-374.01) 21(-16,-393.7) 22(-16,-413.39) 23(-16,-433.07) 24(-16,-452.76) 25(-16,-472.44) 51(624.3,-472.44) 52(624.3,-452.76) 53(624.3,-433.07) 54(624.3,-413.39) 55(624.3,-393.7) 56(624.3,-374.01) 57(624.3,-354.33) 58(624.3,-334.64) 59(624.3,-314.96) 60(624.3,-295.28) 61(624.3,-275.59) 62(624.3,-255.91) 63(624.3,-236.22) 64(624.3,-216.53) 65(624.3,-196.85) 66(624.3,-177.16) 67(624.3,-157.48) 68(624.3,-137.8) 69(624.3,-118.11) 70(624.3,-98.43) 71(624.3,-78.74) 72(624.3,-59.06) 73(624.3,-39.37) 74(624.3,-19.69) 75(624.3,0)
  oval 11.5x90 smd: 26(66.93,-555.37) 27(86.61,-555.37) 28(106.3,-555.37) 29(125.98,-555.37) 30(145.67,-555.37) 31(165.35,-555.37) 32(185.04,-555.37) 33(204.72,-555.37) 34(224.41,-555.37) 35(244.09,-555.37) 36(263.78,-555.37) 37(283.46,-555.37) 38(303.15,-555.37) 39(322.83,-555.37) 40(342.52,-555.37) 41(362.2,-555.37) 42(381.89,-555.37) 43(401.57,-555.37) 44(421.26,-555.37) 45(440.94,-555.37) 46(460.63,-555.37) 47(480.31,-555.37) 48(500,-555.37) 49(519.68,-555.37) 50(539.37,-555.37) 76(539.37,79.93) 77(519.68,79.93) 78(500,79.93) 79(480.31,79.93) 80(460.63,79.93) 81(440.94,79.93) 82(421.26,79.93) 83(401.57,79.93) 84(381.89,79.93) 85(362.2,79.93) 86(342.52,79.93) 87(322.83,79.93) 88(303.15,79.93) 89(283.46,79.93) 90(263.78,79.93) 91(244.09,79.93) 92(224.41,79.93) 93(204.72,79.93) 94(185.04,79.93) 95(165.35,79.93) 96(145.67,79.93) 97(125.98,79.93) 98(106.3,79.93) 99(86.61,79.93) 100(66.93,79.93)
  silkscreen extent -16,-555 622,83
my-key2 [mm]
  rect 2x2 smd: 1(-1.778,0) 2(1.778,0)
  silkscreen extent -2.03,-1.5 2,1.47
N4148 [mil]
  rect 60x60 smd: 1(0,0) 2(135,0)
  silkscreen extent -50,-50 185,50
RESC_E0805_2012X50N [mil] "Resistor, Chip;2.00mm L X 1.20mm W X 0.50mm H"
  rect 50x60 smd: 1(-45,0) 2(45,0)
  silkscreen extent -83,-39 83,39
SMA [mm]
  rect 2.2x2 smd: 1(0,0) 2(4.2,0)
  silkscreen extent -1.5,-1.5 5.7,1.5
SMB#1 [mm]
  rect 2.4x2.4 smd: 1(0.011,0.011) 2(4.411,0.011)
  silkscreen extent -1.39,-1.41 6.03,1.46
SMB#2 [mm] "DO-214-AA/SMB; 2 C-Bend Leads; Body 5.3 x 3.6 mm, inc. leads (LxW)"
  rect 2.3x2.3 smd: 1(-2.25,0) 2(2.25,0)
  silkscreen extent -3.8,-1.55 4.1,1.55
SO-8 [mil] "宽体"
  oval 80x24 smd: 1(0,0) 2(0,-50) 3(0,-100) 4(0,-150) 5(248.03,-150) 6(248.03,-100) 7(248.03,-50) 8(248.03,0)
  silkscreen extent 75,-176 175,24
SO-14 [mil]
  oval 80x24 smd: 1(0,0) 2(0,-50) 3(0,-100) 4(0,-150) 5(0,-200) 6(0,-250) 7(0,-300) 8(220,-300) 9(220,-250) 10(220,-200) 11(220,-150) 12(220,-100) 13(220,-50) 14(220,0)
  silkscreen extent 60,-325 160,25
SOP8_208Mil [mm] "宽体"
  oval 0.6x2.2 smd: 1(-1.905,-3.4) 2(-0.635,-3.4) 3(0.635,-3.4) 4(1.905,-3.4) 5(1.905,3.4) 6(0.635,3.4) 7(-0.635,3.4) 8(-1.905,3.4)
  silkscreen extent -2.88,-4.05 2.5,2
SOT23_95P280X110-3N [mm] "SOT23,0.95mm pitch;3 pin,2.8mm W X 2.90mm L X 1.10mm H body"
  rect 1x0.6 smd: 1(-1.4,0.95) 2(-1.4,-0.95) 3(1.4,0)
  silkscreen extent -2.16,-1.55 0.9,1.92
SOT-23 [mil]
  rect 36x36 smd: 1(0,0) 2(75,0)
  rect 36x50 smd: 3(38,80)
  silkscreen extent -20,-5 95,85
SOT-252 [mm]
  rect 2x1.5 smd: 1(7.62,-2.54) 2(4.572,0) 3(7.62,2.54)
  rect 7.62x5.08 smd: 2(0,0)
  silkscreen extent -1.02,-3.56 6.1,3.56
TLP181 [mm] "光耦隔离，贴片"
  rect 2x1 smd: 1(0,0)
  oval 2x1 smd: 2(0,-2.54) 3(6.6,-2.54) 4(6.6,0)
  silkscreen extent 1.32,-3.05 5.26,0.51
XTAL2A [mil]
  round 55 hole 35: 1(0,-39.74) 2(0,39) 3(480,10.26) 4(300,78.37) 5(300,-79.11)
  silkscreen extent 50,-59 480,59

## Part data
C1 C2 C3 C4 C5 C6 C7 C8 C9 C10 C11 C12 C13 C14 C15 C16 C17 C18 C19 C20 C21 C500 C800: library part CAP, "Capacitor"
D1 D2 D3 D400 D401 D402 D403 D404 D405 D406 D407 D408 D409 D410 D411 D412 D413 D414: library part DIODE, "Diode"
D4 D415: library part "D Zener", "Zener Diode"
DB1 DB2: "Female"
EB1: library part E-3.6V
ED1: library part ELECTRO1, "Electrolytic Capacitor"
ED2 ED3: library part ELECTRO1
JP1 JP2 M_J1 M_J2 M_J3 M_J4 M_J5 M_J6 M_J7 M_J10 M_J11 M_J12 M_J13 M_J14 M_J15 M_J16 M_J17 M_J18: "Header, 3-Pin"
JP3 JP4 P-JP400 P-JP401 P-JP402 P-JP403 P-JP404 P-JP405 P-JP406 P-JP407 P-JP408 P-JP409 P-JP410 P-JP411 P-JP412 P-JP413 P-JP414 R-JP400 R-JP401 R-JP402 R-JP403 R-JP404 R-JP405 R-JP406 R-JP407 R-JP408 R-JP409 R-JP410 R-JP411 R-JP412 R-JP413 R-JP414: library part JUMPER, "Jumper"
JP400 JP401 R400 R401 R402 R403 R404 R405 R406 R407 R408 R409 R410 R411 R412 R413 R414 R415 R416 R417 R418 R419 R420 R421 R422 R423 R424 R425 R426 R427 R428 R429 R430 R431 R432 R433 R434 R435 R436 R437 R438 R439 R440 R441 R442 R443 R444 R608 R609 R610 R800 R801 R802 R803 R804 R805 R806 R807: library part RES2
LED1: library part LED-PH
M_J8 M_J9 M_J19: "Header, 2-Pin"
P2: "Header, 4-Pin, Dual row"
P3 P4 P9: "Header, 5-Pin, Dual row"
P5: "Header, 6-Pin, Dual row"
P8: "Header, 7-Pin"
Q400 Q401 Q402 Q403 Q404 Q405 Q406 Q407 Q408 Q409 Q410 Q411 Q412 Q413 Q414: library part BSS64
R1 R2 R3 R4 R5 R6 R7: library part RES1
R500 R501 R502 R503 R504 R505 R506 R507 R509 R510 R511 R512 R513 R514 R515 R516 R518 R519 R520 R521 R522 R523 R524 R525 R527 R528 R529 R530 R531 R532 R533 R534 R536 R537 R538 R539 R540 R541 R542 R543 R544 R545: library part Res, "General Resistor"
RLYI400 RLYI401 RLYI402 RLYI403 RLYI404 RLYI405 RLYI406 RLYI407 RLYI408 RLYI409 RLYI410 RLYI411 RLYI412 RLYI413 RLYI414: "Single-Pole Single-Throw Relay"
S600: "Switch"
U1: "1.7-5.5V宽电压 256K存储"
U2: "IIC RTC"
U3: "512K Flash, 64K SRAM,LQFP100"
U4: library part LD1117A
U5: library part REF3020, "2.048V ,HIGH OUTPUT CURRENT: 25mA,HIGH ACCURACY: 0.2%"
U400 U401 U402 U403 U404 U405 U406 U407 U408 U409 U410 U411 U412 U413 U414 U500 U501 U502 U503 U504 U505 U506 U507 U510 U511 U512 U513 U514 U515 U516 U517 U519 U520 U521 U522 U523: library part TLP181, "光耦隔离"
U508 U509 U518 U524 U804: library part 74LS14
U605: library part N521-1
U800 U801 U802 U803: "光耦隔离"
Y1 Y2: library part CRYSTAL, "Crystal"

## Via types
v1: diameter 0.762, hole 0.457, Top Layer to Bottom Layer, tented both sides, 126 vias
v2: diameter 1.27, hole 0.711, Top Layer to Bottom Layer, tented both sides, 10 vias

## Nets (pads, with @x,y where several pads share a name; then routed paths per layer and width w, separated by ;. In a path a pad name is that pad's centre, name@x,y a point inside that pad or via, vN(x,y) a via of type N, cw(c..) or ccw(c..) an arc to the next point about the centre after c; other vN are vias at no path point)
+2.5V: C17.1 C18.2 U3.21 U5.2 | length 33.4
  Top Layer w0.254: U3.21@19.387,39.936 21.278,39.936 21.717,39.497 v1(21.717,39.116) ; v1(25.197,56.337) 26.127,56.337 27.356,57.566 v1(27.356,58.141)
  Bottom Layer w0.254: v1(21.717,39.116) 20.574,39.116 19.228,40.462 19.228,50.368 v1(25.197,56.337) ; v1(27.356,58.141) C18.2@28.702,58.141
  Bottom Layer w0.762: C18.2@29.083,58.166 U5.2@33.655,58.166
+9V: P3.4 P5.9 | length 2.8
  Bottom Layer w0.762: P3.4@120.784,46.152 P5.9@123.565,46.152
+12V: M_J5.2 P5.8 | length 34.2
  Top Layer w1.016: M_J5.2@125.222,76.122 125.222,60.68 127.66,58.242 127.66,45.142 P5.8@126.118,43.599
+V: P3.3 P5.10 | length 20.8
  Bottom Layer w0.762: P3.3@118.244,46.152 116.535,47.86 116.535,49.488 118.609,51.562 125.73,51.562 127.508,49.784 127.508,47.529 P5.10@126.118,46.139
-9V: P3.6 P5.7 | length 2.8
  Bottom Layer w0.762: P3.6@120.784,43.612 P5.7@123.565,43.612
-V: P3.1 P5.12 | length 9.2
  Bottom Layer w0.762: P3.1@118.244,48.692 119.844,50.292 124.505,50.292 P5.12@126.118,48.679
AC8+: M_J2.1 P4.1 P4.2 | length 26.4
  Bottom Layer w1.778: M_J2.1@176.048,76.122 176.048,74.396 179.07,71.374 179.07,58.928 181.369,56.629 P4.1@183.573,56.629 P4.2@186.113,56.629
AC8-: M_J2.2 P4.3 P4.4 | length 32.7
  Bottom Layer w1.778: M_J2.2@170.968,76.122 173.84,78.994 176.784,78.994 178.562,77.216 178.562,74.93 181.356,72.136 181.356,60.452 182.639,59.169 P4.3@183.573,59.169 P4.4@186.113,59.169
AC11+: M_J1.1 P4.5 P4.6 | length 20.8
  Bottom Layer w1.778: P4.5@183.573,61.709 P4.6@186.113,61.709 188.963,61.709 191.32,64.066 M_J1.1@191.32,76.124
AC11-: M_J1.3 P4.9 P4.10 | length 13.9
  Bottom Layer w1.778: M_J1.3@181.16,76.124 186.113,71.171 P4.10@186.113,66.789 P4.9@183.573,66.789
ADC1: P8.2 U3.18 | length 32.9
  Top Layer w0.254: P8.2@1.778,53.848 3.886,51.74 3.886,41.023 8.105,36.805 12.929,36.805 17.56,41.436 U3.18@19.387,41.436
ADC2: P8.1 U3.17 | length 34.9
  Top Layer w0.254: P8.1@1.778,56.388 4.318,53.848 4.318,41.202 8.284,37.236 12.725,37.236 17.425,41.936 U3.17@19.387,41.936
AGND: P3.2 P5.11 | length 2.8
  Bottom Layer w0.762: P3.2@120.784,48.692 P5.11@123.565,48.692
AGND0: M_J1.2 P4.7 P4.8 | length 17.3
  Bottom Layer w1.778: P4.7@183.573,64.249 P4.8@186.113,64.249 187.439,64.249 188.722,65.532 188.722,73.641 M_J1.2@186.24,76.124
BOOT0: R610.1 U3.94 U605.3 | length 87
  Top Layer w0.254: v1(12.954,55.626) 5.842,55.626 3.556,57.912 1.016,57.912 0.508,57.404 0.508,35.052 2.946,32.614 11.913,32.614 14.249,30.277 14.249,22.758 14.91,22.098 16.053,22.098 17.577,23.622 17.78,23.622 U605.3@17.78,20.062 ; U3.94@24.519,52.068 24.511,52.076 24.511,57.023 24.892,57.404 v1(24.892,58.141)
  Bottom Layer w0.254: v1(12.954,55.626) 12.954,56.642 14.021,57.709 15.094,57.709 15.475,58.09 24.892,58.09 v1(24.892,58.141)
CTRL1: M_J9.2 P-JP400.1 R-JP400.1 | length 22.1
  Top Layer w1.524: P-JP400.1@50.8,73.526 61.588,73.526 64.186,76.124 M_J9.2@69.298,76.124 ; 56.515,73.653 R-JP400.1@56.515,76.193
CTRL1_0: D400.1 P-JP400.2 Q400.3 RLYI400.4 | length 12.4
  Top Layer w1.016: Q400.3@38.1,76.972 41.981,76.972 RLYI400.4@42.76,76.193 43.141,75.812 P-JP400.2@50.038,75.812
CTRL1_1: R-JP400.2 RLYI400.1 | length 2.2
  Top Layer w1.524: R-JP400.2@58.801,76.193 RLYI400.1@60.96,76.193
CTRL2: M_J9.1 P-JP401.1 R-JP401.1 | length 28.7
  Top Layer w1.524: P-JP401.1@50.546,81.788 68.714,81.788 M_J9.1@74.378,76.124 ; 56.515,81.781 R-JP401.1@56.515,84.321
CTRL2_0: D401.1 P-JP401.2 Q401.3 RLYI401.4 | length 13.7
  Top Layer w1.016: Q401.3@38.1,85.1 41.909,85.1 ; RLYI401.4@42.832,84.249 41.981,85.1 41.909,85.1 ; P-JP401.2@50.038,83.94 43.069,83.94 RLYI401.4@42.76,84.249 41.909,85.1
CTRL2_1: R-JP401.2 RLYI401.1 | length 2.2
  Top Layer w1.524: R-JP401.2@58.801,84.321 RLYI401.1@60.96,84.321
CTRL3: M_J8.2 P-JP402.1 R-JP402.1 | length 38.6
  Top Layer w1.524: P-JP402.1@50.546,65.398 56.515,65.398 ; R-JP402.1@56.515,68.065 56.515,65.398 ; M_J8.2@79.483,76.124 76.766,73.406 66.802,73.406 64.77,71.374 64.77,67.056 63.112,65.398 56.515,65.398
CTRL3_0: D402.1 P-JP402.2 Q402.3 RLYI402.4 | length 13.7
  Top Layer w1.016: Q402.3@38.1,68.844 41.909,68.844 ; RLYI402.4@42.832,67.993 41.981,68.844 41.909,68.844 ; P-JP402.2@50.038,67.684 43.069,67.684 RLYI402.4@42.76,67.993 41.909,68.844
CTRL3_1: R-JP402.2 RLYI402.1 | length 2.2
  Top Layer w1.524: R-JP402.2@58.801,68.065 RLYI402.1@60.96,68.065
CTRL4: M_J8.1 P-JP403.1 R-JP403.1 | length 31.3
  Top Layer w1.524: R-JP403.1@67.317,64.389 69.857,64.389 ; P-JP403.1@69.984,57.912 69.984,69.215 72.143,71.374 77.985,71.374 80.271,73.66 82.1,73.66 M_J8.1@84.563,76.124
CTRL4_0: D403.1 P-JP403.2 Q403.3 RLYI403.4 | length 14.3
  Top Layer w1.016: RLYI403.4@67.444,50.634 P-JP403.2@67.444,57.658
  Bottom Layer w0.762: RLYI403.4@67.389,50.634 69,50.634 72.012,47.622 Q403.3@72.012,46.228
CTRL4_1: R-JP403.2 RLYI403.1 | length 2.1
  Top Layer w1.524: R-JP403.2@67.389,66.747 RLYI403.1@67.389,68.834
CTRL5: M_J7.3 P-JP404.1 R-JP404.1 | length 27.7
  Top Layer w1.524: R-JP404.1@75.445,64.389 77.985,64.389 ; P-JP404.1@78.112,57.912 78.112,68.326 81.414,71.628 85.168,71.628 M_J7.3@89.662,76.122
CTRL5_0: D404.1 P-JP404.2 Q404.3 RLYI404.4 | length 14.1
  Top Layer w1.016: RLYI404.4@75.445,50.634 P-JP404.2@75.445,57.531
  Bottom Layer w1.016: RLYI404.4@75.445,50.634 76.874,50.634 80.115,47.393 Q404.3@80.115,46.228
CTRL5_1: R-JP404.2 RLYI404.1 | length 2.2
  Top Layer w1.524: R-JP404.2@75.445,66.675 RLYI404.1@75.445,68.834
CTRL6: M_J7.2 P-JP405.1 R-JP405.1 | length 24.4
  Top Layer w1.524: R-JP405.1@83.573,64.389 86.24,64.389 ; P-JP405.1@86.24,57.912 86.24,64.389 ; M_J7.2@94.742,76.122 86.24,67.619 86.24,64.389
CTRL6_0: D405.1 P-JP405.2 Q405.3 RLYI405.4 | length 14.1
  Top Layer w1.016: RLYI405.4@83.573,50.634 P-JP405.2@83.573,57.531
  Bottom Layer w1.016: RLYI405.4@83.573,50.634 85.002,50.634 88.243,47.393 Q405.3@88.243,46.228
CTRL6_1: R-JP405.2 RLYI405.1 | length 2.2
  Top Layer w1.524: R-JP405.2@83.573,66.675 RLYI405.1@83.573,68.834
CTRL7: M_J7.1 P-JP406.1 R-JP406.1 | length 22.9
  Top Layer w1.524: R-JP406.1@91.701,64.389 93.987,64.389 ; P-JP406.1@94.114,57.912 94.114,70.413 M_J7.1@99.822,76.122
CTRL7_0: D406.1 P-JP406.2 Q406.3 RLYI406.4 | length 14.3
  Top Layer w1.016: RLYI406.4@91.828,50.761 P-JP406.2@91.828,57.912
  Bottom Layer w1.016: RLYI406.4@91.701,50.634 93.13,50.634 96.371,47.393 Q406.3@96.371,46.228
CTRL7_1: R-JP406.2 RLYI406.1 | length 2.2
  Top Layer w1.524: R-JP406.2@91.701,66.675 RLYI406.1@91.701,68.834
CTRL8: M_J6.3 P-JP407.1 R-JP407.1 | length 21.8
  Top Layer w1.524: R-JP407.1@99.829,64.389 102.115,64.389 102.242,64.262 ; P-JP407.1@102.242,57.912 102.242,64.262 ; M_J6.3@104.902,76.122 102.242,73.461 102.242,64.262
CTRL8_0: D407.1 P-JP407.2 Q407.3 RLYI407.4 | length 14.3
  Top Layer w1.016: RLYI407.4@99.956,50.761 P-JP407.2@99.956,57.912
  Bottom Layer w1.016: RLYI407.4@99.829,50.634 101.258,50.634 104.499,47.393 Q407.3@104.499,46.228
CTRL8_1: R-JP407.2 RLYI407.1 | length 2.2
  Top Layer w1.524: R-JP407.2@99.829,66.675 RLYI407.1@99.829,68.834
CTRL9: M_J6.2 P-JP408.1 R-JP408.1 | length 20.8
  Top Layer w1.524: R-JP408.1@107.957,64.389 110.37,64.389 ; M_J6.2@109.982,76.122 110.37,75.735 110.37,64.389 ; P-JP408.1@110.37,57.912 110.37,64.389
CTRL9_0: D408.1 P-JP408.2 Q408.3 RLYI408.4 | length 14.5
  Top Layer w1.016: RLYI408.4@107.957,50.634 D408.1@107.957,54.61 107.957,57.785 P-JP408.2@108.084,57.912
  Bottom Layer w1.016: RLYI408.4@107.957,50.634 109.386,50.634 112.627,47.393 Q408.3@112.627,46.228
CTRL9_1: R-JP408.2 RLYI408.1 | length 2.2
  Top Layer w1.524: R-JP408.2@107.957,66.675 RLYI408.1@107.957,68.834
CTRL10: M_J4.2 P-JP409.1 R-JP409.1 | length 23.3
  Top Layer w1.524: R-JP409.1@131.325,64.389 133.611,64.389 ; P-JP409.1@133.738,57.912 133.738,69.372 M_J4.2@140.488,76.122
CTRL10_0: D409.1 P-JP409.2 Q409.3 RLYI409.4 | length 18.2
  Top Layer w1.016: P-JP409.2@131.452,57.912 131.325,57.785 D409.1@131.325,54.61 RLYI409.4@131.325,50.634 131.325,47.009 133.782,44.552 v2@135.941,44.552
  Bottom Layer w1.016: Q409.3@135.893,46.228 135.893,44.65 v2(135.941,44.602)
CTRL10_1: R-JP409.2 RLYI409.1 | length 2.2
  Top Layer w1.524: R-JP409.2@131.325,66.675 RLYI409.1@131.325,68.834
CTRL11: M_J4.1 P-JP410.1 R-JP410.1 | length 22
  Top Layer w1.524: R-JP410.1@139.453,64.389 141.739,64.389 ; P-JP410.1@141.866,57.912 141.866,71.711 145.568,75.413 M_J4.1@145.568,76.122
CTRL11_0: D410.1 P-JP410.2 Q410.3 RLYI410.4 | length 14.5
  Top Layer w1.016: RLYI410.4@139.453,50.634 D410.1@139.453,54.61 139.453,57.785 P-JP410.2@139.58,57.912
  Bottom Layer w1.016: RLYI410.4@139.453,50.634 140.882,50.634 144.123,47.393 Q410.3@144.123,46.228
CTRL11_1: R-JP410.2 RLYI410.1 | length 2.2
  Top Layer w1.524: R-JP410.2@139.453,66.675 RLYI410.1@139.453,68.834
CTRL12: M_J3.3 P-JP411.1 R-JP411.1 | length 20.8
  Top Layer w1.524: R-JP411.1@147.581,64.389 149.867,64.389 ; P-JP411.1@149.994,57.912 149.994,75.468 M_J3.3@150.648,76.122
CTRL12_0: D411.1 P-JP411.2 Q411.3 RLYI411.4 | length 14.5
  Top Layer w1.016: RLYI411.4@147.581,50.634 D411.1@147.581,54.61 147.581,57.785 P-JP411.2@147.708,57.912
  Bottom Layer w1.016: RLYI411.4@147.581,50.634 149.01,50.634 152.251,47.393 Q411.3@152.251,46.228